# Altium PCB 超声波测距.PcbDoc
Units mil, origin at the board's own origin, x right, y up, seen from the top; angles counter-clockwise.
Board outline 6000 x 4000 mil, 2 copper layers (Top Layer, Bottom Layer); 25 components, 44 nets, 140 pads, 0 vias.
Unrouted connection lines stored in the file: 1.
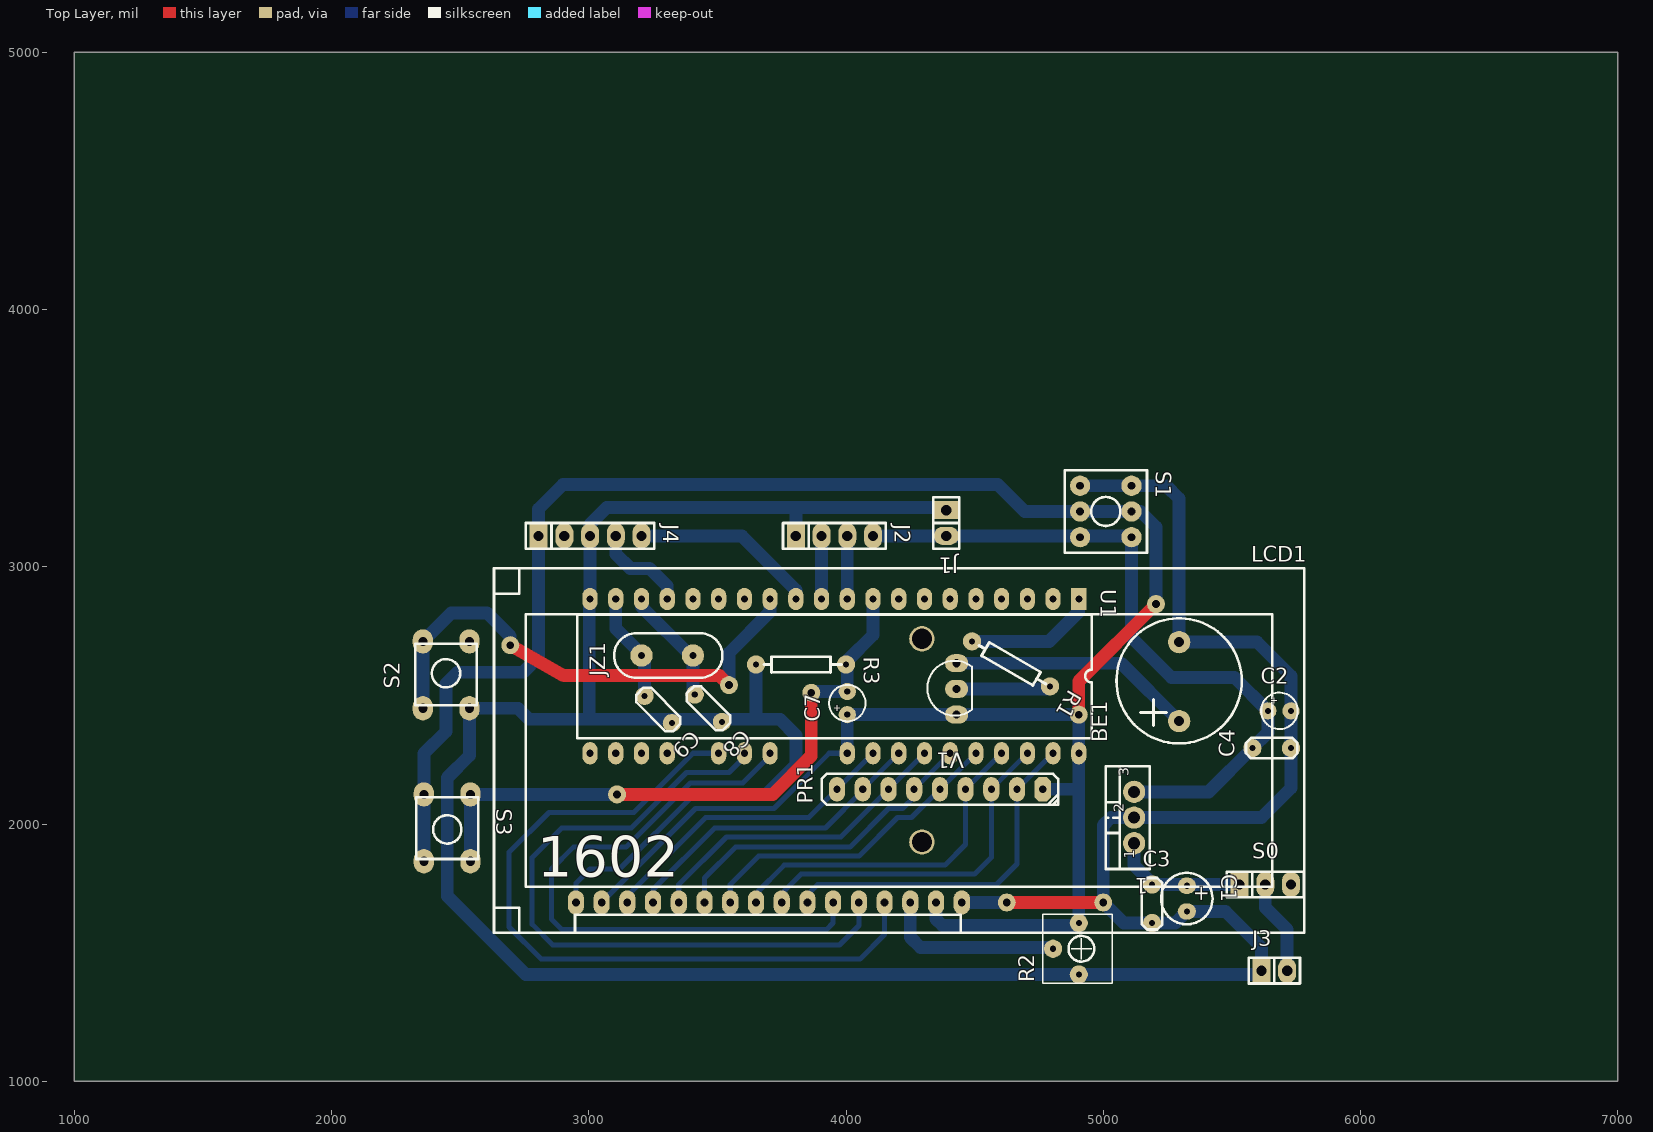
[diagram p0: Top Layer view]
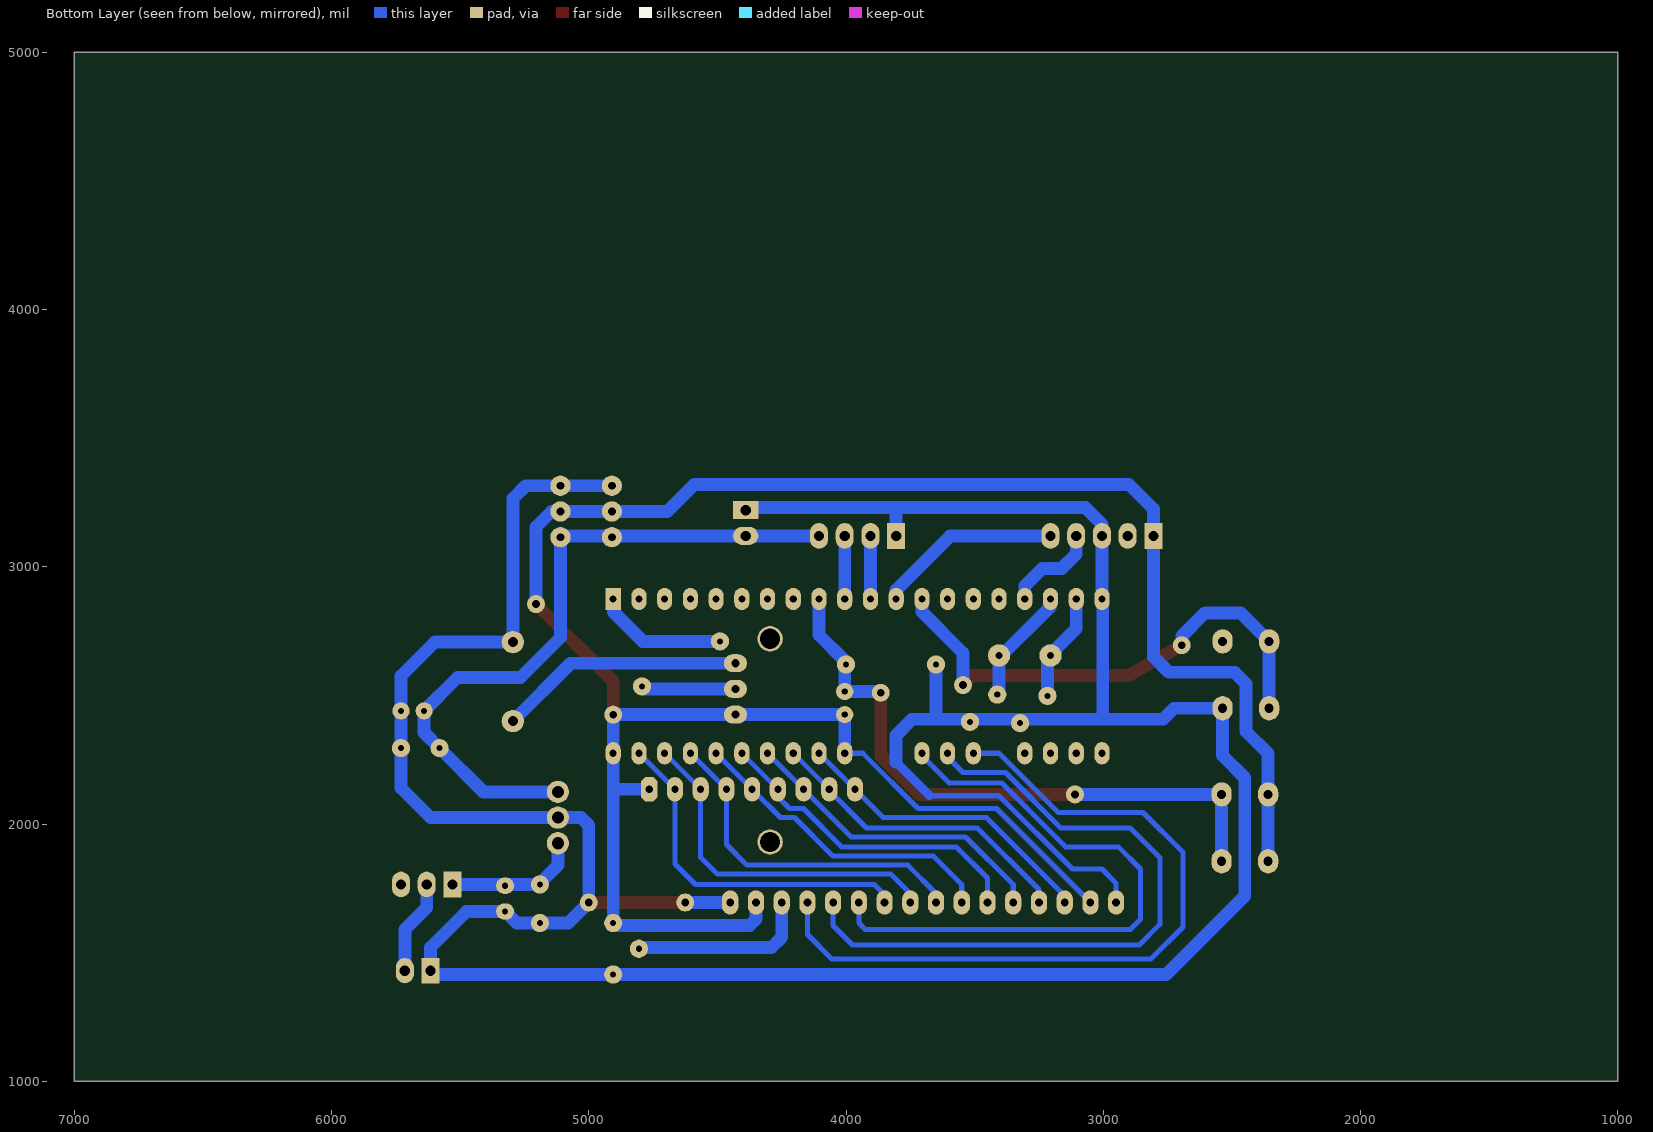
[diagram p1: Bottom Layer view, seen from below]

## Layer stack, top to bottom
Top Layer: signal copper 1.4
Dielectric: dielectric 12.6, FR-4, Dk 4.8
Bottom Layer: signal copper 1.4

## Board outline
1000,1000 7000,1000 7000,5000 1000,5000

## Design rules (kind name [scope] priority, off if disabled: settings)
Clearance [All] p1: gap=10
ComponentClearance [All] p1 off: gap=10 collisioncheckmode=3 verticalgap=10 showdistances=FALSE
PolygonConnect [All] p1: connectstyle=Relief reliefconductorwidth=10 reliefentries=4 polygonreliefangle="90 Angle" airgapwidth=10
RoutingVias [All] p1: holewidth=28 width=50 viastyle="Through Hole" minholewidth=28 minwidth=50 maxholewidth=28 maxwidth=50
SolderMaskExpansion [All] p1: expansion=4
Width [All] p1: maxlimit=100 minlimit=10 preferedwidth=10
27 further rules are at their usual default settings.

## Components (designator, comment, footprint, x,y, rotation, side; value= is the part's Value field where it differs from the comment)
1 "7805" TO-220 5120,1925 r270 top
BE1 "BEEP" DB 5295,2400 r90 top
C1 "100uF" CAO2 5325,1710 r270 top
C2 "22uF" CAO1 5685,2440 r0 top
C3 "104" CAP1 5190,1690 r90 top
C4 "103" CAP1 5655,2295 r180 top
C7 "10uF" CAO1 4005,2470 r90 top
C8 "30P" CAP1 3465,2450 r315 top
C9 "30P" CAP1 3270,2445 r315 top
J1 "CON2" sip-2 4390,3220 r270 top
J2 "CON4" sip-4 3805,3120 r0 top
J3 "CON2" sip-2 5615,1430 r0 top
J4 "CON5" sip-5 2805,3120 r0 top
JZ1 "12M" JZ1 3305,2655 r180 top
LCD1 "1602" RZ1602 4450,1695 r0 top
PR1 "10k" RP1 4765,2135 r180 top
R1 "200" AXIAL0.3 4490,2710 r330 top
R2 "10k" RVR-5 4805,1515 r90 top
R3 "10k" AXIAL0.3 3650,2620 r0 top
S0 "SW-SPDT" SIP-3 5530,1765 r0 top
S1 "SW-DPDT" SW3 4770,3155 r270 top
S2 "SW-PB" SW6*6 2355,2450 r90 top
S3 "SW-PB" SW6*6 2540,2115 r270 top
U1 "AT89S52A" DIP-40 4905,2875 r270 top
V1 "8550" TO92a 4430,2425 r180 top

## Footprints (in the part's own frame and the unit in brackets; to place one, negate y for a bottom-side part, rotate by r counter-clockwise, add the part's x,y. Pads: shape width x height; smd on the part's side, far side on the other; paste and mask are expansions set on the pad)
AXIAL0.3 [mm]
  round 1.8 hole 0.6: 1(0,0) 2(8.89,0)
  silkscreen extent 0.81,-0.76 8.43,0.76
CAO1 [mm]
  round 1.7 hole 0.6: 1(-1.143,0) 2(1.143,0)
  silkscreen extent -1.8,-1.8 1.8,1.8
CAO2 [mm]
  oval 1.6x1.8 hole 0.6: 1(-1.27,0) 2(1.27,0)
  silkscreen extent -2.54,-2.54 2.54,2.54
CAP1 [mm]
  round 1.8 hole 0.6: 1(-1.905,0) 2(1.905,0)
  silkscreen extent -2.54,-1.02 2.54,1.02
DB [mm]
  round 2.2 hole 1: 1(0,0) 2(7.8,0)
  silkscreen extent -2.2,-6.18 10.15,6.18
DIP-40 [mm]
  rect 2.2x1.5 hole 0.7: 1(0,0)
  oval 2.2x1.5 hole 0.7: 2(0,-2.54) 3(0,-5.08) 4(0,-7.62) 5(0,-10.16) 6(0,-12.7) 7(0,-15.24) 8(0,-17.78) 9(0,-20.32) 10(0,-22.86) 11(0,-25.4) 12(0,-27.94) 13(0,-30.48) 14(0,-33.02) 15(0,-35.56) 16(0,-38.1) 17(0,-40.64) 18(0,-43.18) 19(0,-45.72) 20(0,-48.26) 21(15.24,-48.26) 22(15.24,-45.72) 23(15.24,-43.18) 24(15.24,-40.64) 26(15.24,-35.56) 27(15.24,-33.02) 28(15.24,-30.48) 31(15.24,-22.86) 32(15.24,-20.32) 33(15.24,-17.78) 34(15.24,-15.24) 35(15.24,-12.7) 36(15.24,-10.16) 37(15.24,-7.62) 38(15.24,-5.08) 39(15.24,-2.54) 40(15.24,0)
  round 0 all layers, no hole: 25(15.24,-38.1) 29(15.24,-27.94) 30(15.24,-25.4)
  silkscreen extent 1.55,-49.53 13.74,1.27
JZ1 [mm]
  round 2.2 hole 0.7: 1(-2.54,0) 2(2.54,0)
  silkscreen extent -5.45,-2.2 5.25,2.2
RP1 [mm]
  oct 1.6x2.4 hole 0.7: 1(0,0)
  oval 1.6x2.4 hole 0.7: 2(2.54,0) 3(5.08,0) 4(7.62,0) 5(10.16,0) 6(12.7,0) 7(15.24,0) 8(17.78,0) 9(20.32,0)
  silkscreen extent -1.52,-1.52 21.84,1.52
RVR-5 [mm]
  round 1.8 hole 0.6: 1(-2.54,-2.54) 2(0,0) 3(2.54,-2.54)
  silkscreen extent -3.43,-5.84 3.43,1.02
RZ1602 [mm]
  round 0 all layers, no hole: 0(-43.688,-0.508) 0(-43.688,30.492) 0(31.312,-0.508) 0(31.312,30.492)
  oval 1.6x2.4 hole 0.762: 1(0,0) 2(-2.54,0) 3(-5.08,0) 4(-7.62,0) 5(-10.16,0) 6(-12.7,0) 7(-15.24,0) 8(-17.78,0) 9(-20.32,0) 10(-22.86,0) 11(-25.4,0) 12(-27.94,0) 13(-30.48,0) 14(-33.02,0) 15(-35.56,0) 16(-38.1,0)
  silkscreen extent -46.19,-3.01 33.81,32.99
sip-2 [mil]
  rect 70x100 hole 40: 1(0,0)
  oval 70x98.42 hole 40: 2(100,0)
  silkscreen extent -50,-50 150,50
SIP-3 [mil]
  rect 70x100 hole 40: 1(0,0)
  oval 70x100 hole 40: 2(100,0) 3(200,0)
  silkscreen extent -50,-50 250,50
sip-4 [mil]
  rect 70x100 hole 40: 1(0,0)
  oval 70x100 hole 40: 2(100,0) 3(200,0) 4(300,0)
  silkscreen extent -50,-50 350,50
sip-5 [mil]
  rect 70x100 hole 40: 1(0,0)
  oval 70x100 hole 40: 2(100,0) 3(200,0) 4(300,0) 5(400,0)
  silkscreen extent -50,-50 450,50
SW3 [mil]
  round 78.74 hole 30: 0(-160,340) 1(40,340) 2(-60,340) 3(-160,140) 4(40,140) 5(-60,140)
  silkscreen extent -220,80 100,400
SW6*6 [mm]
  oval 2.4x2 hole 0.9: 1(0,0) 1(6.6,0) 2(0,-4.6) 2(6.6,-4.6)
  silkscreen extent 0.28,-5.34 6.38,0.76
TO92a [mil]
  oval 90x70 hole 31.5: 1(0,0) 2(0,-100) 3(0,-200)
  silkscreen extent -60,-209 114,4
TO-220 [mm]
  round 2.2 hole 1.2: 1(0,0) 2(-2.54,0) 3(-5.08,0)
  silkscreen extent -7.62,-2.8 2.54,1.52

## Part data
C1 C2: library part "Cap Pol1", "Polarized Capacitor (Radial)"
C3 C4: library part Cap, "Capacitor"
C7: library part CAP3
C8 C9: library part CAP1
J1 J2 J3 J4: "Connector"
JZ1: library part CRY1, "6.0000 8.000  11.0592  12.0000 24.000"
PR1: library part PRES1
R1 R3: library part RES
R2: library part RPOT-1, "Potentiometer"

## Free pads (board coordinates)
  round 70 hole 30: 2(4625,1695) 4(5000,1695) 5(3545,2540) 6(2695,2695) 7(3865,2510) 8(3110,2115) 9(5205,2855) 10(4905,2425)
  round 98.43 hole 78.74: 11(4295,1930) 11(4295,2720)

## Nets (pads, with @x,y where several pads share a name; then routed paths per layer and width w, separated by ;. In a path a pad name is that pad's centre, name@x,y a point inside that pad or via, vN(x,y) a via of type N, cw(c..) or ccw(c..) an arc to the next point about the centre after c; other vN are vias at no path point)
7.5V: 1.1 C1.1 C3.2 S0.1 | length 526.1
  Bottom Layer w50: 1.1 5120,1840 5195,1765 S0.1
+5V: C7.1 J4.1 LCD1.2 LCD1.15 pad.9 pad.10 PR1.1 R2.3 S1.2 S1.5 S3.2 U1.31 U1.40 V1.1 | length 8891.6
  Top Layer w50: pad.10 4905,2555 pad.9
  Bottom Layer w20: LCD1.15 3415,2060 3720,2060 3935,2275 U1.31
  Bottom Layer w50: S3.2@2358.9,1855.16 2358.9,2115 2358.9,2273.9 2445,2360 2445,2545 2490,2590 2745,2590 2805,2650 J4.1 2805,3225 2900,3320 4590,3320 4695,3215 S1.5 S1.2 5145,3215 5205,3155 pad.9 ; U1.31 C7.1 pad.10 U1.40 4905,2135 ; LCD1.2 4350,1630 4375,1605 R2.3@4905,1605 ; PR1.1 4905,2135 ; R2.3 4905,2135
GND: 1.2 BE1.2 C1.2 C2.2 C3.1 C4.1 C8.2 C9.2 J1.1 J2.1 J3.1 J4.3 LCD1.1 LCD1.16 pad.2 pad.4 R2.1 R3.1 S1.0 S1.3 S2.2 U1.20 | length 13446.9
  Top Layer w50: pad.2 pad.4
  Bottom Layer w20: LCD1.16 2950,1770 3005,1825 3120,1825 3405,2110 3675,2110
  Bottom Layer w35: 3675,2110 3805,2240
  Bottom Layer w50: R3.1 3650,2406.97 ; 3805,2240 3805,2345 3743.03,2406.97 3650,2406.97 ; J2.1 3805,3230 ; J1.1 4380,3230 3805,3230 ; LCD1.1 pad.2 ; S1.3 S1.0 5245,3315 5295,3265 BE1.2 5597.91,2707.09 5730,2575 C2.2 C4.1 5730,2140 5615,2025 1.2 5030,2025 5000,1995 pad.4 5080,1615 C3.1 5280,1615 C1.2 5475,1660 5615,1520 J3.1 5600,1415 R2.1 2755,1415 2449.9,1720.1 2449.9,2179.9 2536.1,2266.1 2536.1,2450 2725,2450 2768.03,2406.97 3001.97,2406.97 ; 3001.97,2406.97 3650,2406.97 ; 3001.97,2406.97 3001.97,2871.97 U1.20 J4.3 3005,3165 3070,3230 3805,3230
"MCU RXD": J2.3 U1.10 | length 245
  Bottom Layer w50: U1.10 J2.3
"MCU TXD": J2.2 U1.11 | length 245
  Bottom Layer w50: U1.11 J2.2
NC: J4.2
NetBE1_1: BE1.1 V1.3 | length 958.2
  Bottom Layer w50: V1.3 5070,2625 BE1.1
NetJ3_2: J3.2 S0.2 | length 370.2
  Bottom Layer w50: S0.2 5630,1675 5715,1590 J3.2
NetLCD1_3: LCD1.3 R2.2 | length 711.6
  Bottom Layer w50: LCD1.3 4250,1560 4290,1520 R2.2@4810,1520
NetR1_2: R1.2 V1.2 | length 367.3
  Bottom Layer w50: V1.2 4783.11,2525 R1.2
P00: LCD1.7 PR1.2 U1.39 | length 1382.7
  Bottom Layer w20: LCD1.7 3850,1725 3890,1765 4585,1765 4665,1845 PR1.2 U1.39
P01: LCD1.8 PR1.3 U1.38 | length 1371
  Bottom Layer w20: LCD1.8 3750,1730 3825,1805 4500,1805 4565,1870 PR1.3 U1.38
P02: LCD1.9 PR1.4 U1.37 | length 1341.7
  Bottom Layer w20: LCD1.9 3650,1730 3760,1840 4385,1840 4465,1920 PR1.4 U1.37
P03: LCD1.10 PR1.5 U1.36 | length 1236.2
  Bottom Layer w20: LCD1.10 3550,1765 3660,1875 4050,1875 4200,2025 4255,2025 PR1.5 U1.36
P04: LCD1.11 PR1.6 U1.35 | length 1268.5
  Bottom Layer w20: LCD1.11 3450,1790 3570,1910 4015,1910 4165,2060 4220,2060 4265,2105 PR1.6 U1.35
P05: LCD1.12 PR1.7 U1.34 | length 1236.2
  Bottom Layer w20: LCD1.12 3350,1765 3535,1950 3980,1950 PR1.7 U1.34
P06: LCD1.13 PR1.8 U1.33 | length 1227.5
  Bottom Layer w20: LCD1.13 3250,1745 3490,1985 3920,1985 4065,2130 PR1.8 U1.33
P07: LCD1.14 PR1.9 U1.32 | length 1209.9
  Bottom Layer w20: LCD1.14 3150,1720 3455,2025 3855,2025 PR1.9 U1.32
P10: R1.1 U1.1 | length 512.6
  Bottom Layer w50: R1.1 4790,2710 4905,2825 U1.1
P11: U1.2
P12: U1.3
P13: U1.4
P14: U1.5
P15: U1.6
P16: U1.7
P17: U1.8
P20: U1.21
P21: U1.22
P22: U1.23
P23: U1.24
P24: U1.25
P25: LCD1.4 U1.26 | length 2940.6
  Bottom Layer w20: U1.26 3405,2275 3175,2045 2845,2045 2690,1890 2690,1600 2815,1475 4055,1475 4150,1570 LCD1.4
P26: LCD1.5 U1.27 | length 2685.7
  Bottom Layer w20: U1.27 3605,2260 3545,2200 3380,2200 3165,1985 2895,1985 2780,1870 2780,1610 2860,1530 3975,1530 4050,1605 LCD1.5
P27: LCD1.6 U1.28 | length 2439.2
  Bottom Layer w20: U1.28 3705,2265 3600,2160 3395,2160 3145,1910 2940,1910 2855,1825 2855,1630 2895,1590 3925,1590 3950,1615 LCD1.6
P32: J4.5 U1.12 | length 722
  Bottom Layer w50: J4.5 3595,3120 3805,2910 U1.12
P33: pad.5 pad.6 S2.1 U1.13 | length 2015.5
  Top Layer w50: pad.6 2903.31,2576.69 3508.31,2576.69 pad.5
  Bottom Layer w50: S2.1@2355,2450 2355,2709.84 2465.16,2820 2605,2820 2695,2730 pad.6 ; pad.5 3545,2665 3705,2825 U1.13
P34: U1.14
P35: U1.15
P36: U1.16
P37: J4.4 U1.17 | length 371.8
  Bottom Layer w50: J4.4 3105,3050 3161.1,2993.9 3236.1,2993.9 3305,2925 U1.17
RST: C7.2 pad.7 pad.8 R3.2 S3.1 U1.9 | length 2405.5
  Top Layer w50: pad.8 3715,2115 3865,2265 pad.7
  Bottom Layer w50: S3.1@2540,1855.16 2540,2115 pad.8 ; pad.7 3870,2515 C7.2 ; C7.2@4005,2545 4005,2635 4105,2735 U1.9
VCC: 1.3 C2.1 C4.2 J1.2 J2.4 S1.1 S1.4 | length 2743.3
  Bottom Layer w50: J2.4 J1.2 S1.1@5110,3120 ; S1.1 5110,2725 5265,2570 5510,2570 C2.1 5640,2355 C4.2 5410,2125 1.3
X1: C9.1 JZ1.2 U1.19 | length 411.3
  Bottom Layer w50: U1.19 3105,2760 JZ1.2@3200,2665 ; JZ1.2 3216.97,2643.03 C9.1
X2: C8.1 JZ1.1 U1.18 | length 474.8
  Bottom Layer w50: U1.18 3205,2845 JZ1.1@3405,2645 ; JZ1.1 JZ1.1@3405,2645 ; JZ1.1@3410,2640 JZ1.1@3405,2645 ; C8.1 3405,2510 JZ1.1@3405,2645
pads on no net: LCD1.0 S0.3 U1.29 U1.30

## Text inside footprints (layer, text, board x,y; h text height)
1: Top Overlay "2" at 5080,2045 h39.37 r90; Top Overlay "3" at 5100,2185 h39.37 r90
C1: Top Overlay "+" at 5358.47,1764.13 h60 r270
C2: Top Overlay "+" at 5648.58,2466.57 h27.56
C7: Top Overlay "+" at 3978.43,2433.58 h27.56 r90